# Altium PCB JacdacAccelerometer 30.PcbDoc
Units mm, origin at the board's own origin, x right, y up, seen from the top; angles counter-clockwise.
Board outline 19.05 x 30.7 mm, 2 copper layers (Top Layer, Bottom Layer), stack 1.525 mm thick; 29 components, 18 nets, 109 pads, 22 vias.
Unrouted connection lines stored in the file: 15.
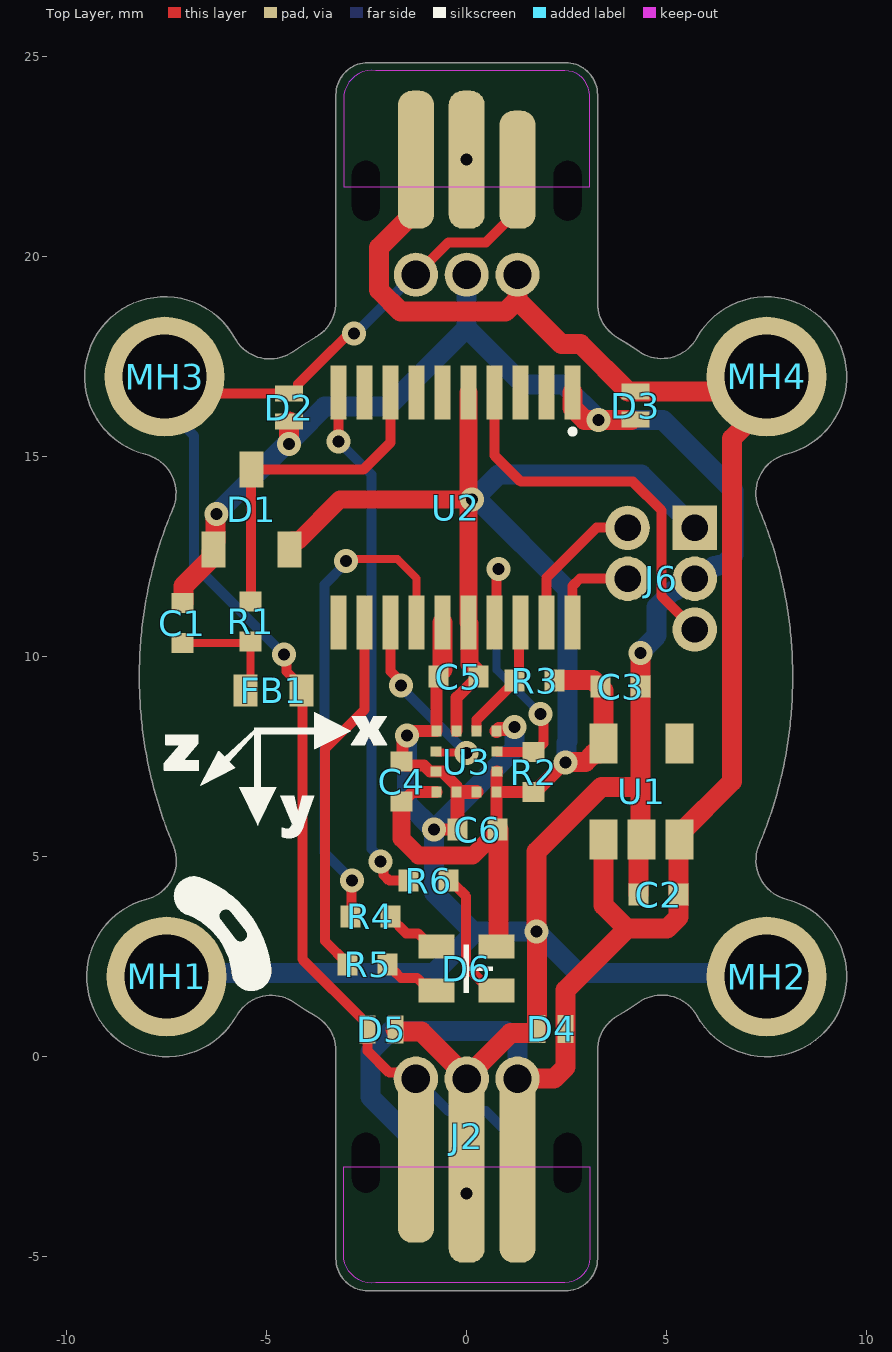
[diagram p0: Top Layer view]
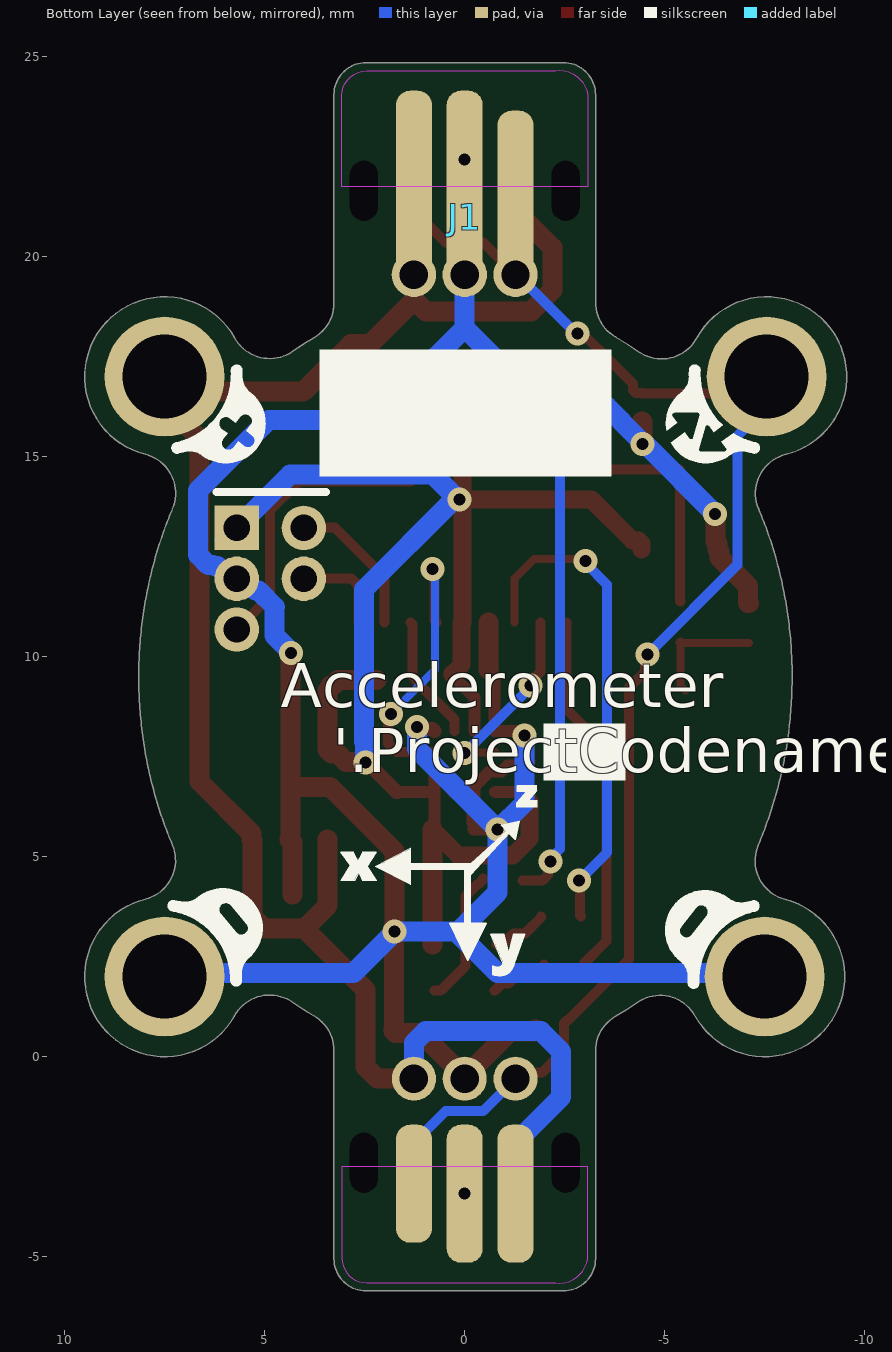
[diagram p1: Bottom Layer view, seen from below]

## Layer stack, top to bottom
Top Solder: solder mask 0.0102, Solder Resist, Dk 3.5
Top Layer: signal copper 0.0356
Dielectric 1: core 1.454, FR-4, Dk 4.2
Bottom Layer: signal copper 0.0356
Bottom Solder: solder mask 0.0102, Solder Resist, Dk 3.5

## Board outline
-8.06,7.849 -8.073,7.935 -8.085,8.021 -8.096,8.107 -8.107,8.193 -8.117,8.28 -8.126,8.366 -8.135,8.453 -8.143,8.539 -8.15,8.626 -8.156,8.712 -8.162,8.799 -8.167,8.886 -8.172,8.973 -8.176,9.06 -8.179,9.147 -8.182,9.234 -8.183,9.321 -8.184,9.408 -8.185,9.495 -8.185,9.582 -8.184,9.669 -8.182,9.756 -8.18,9.843 -8.177,9.93 -8.173,10.017 -8.169,10.104 -8.164,10.191 -8.158,10.278 -8.151,10.364 -8.144,10.451 -8.137,10.538 -8.128,10.624 -8.119,10.71 -8.109,10.797 -8.099,10.883 -8.087,10.969 -8.075,11.055 -8.063,11.141 -8.05,11.226 -8.036,11.312 -8.021,11.397 -8.006,11.483 -7.99,11.568 -7.974,11.653 -7.956,11.737 -7.938,11.822 -7.92,11.906 -7.901,11.99 -7.881,12.074 -7.86,12.158 -7.839,12.241 -7.817,12.324 -7.794,12.407 -7.771,12.49 -7.747,12.573 -7.723,12.655 -7.698,12.737 -7.672,12.819 -7.646,12.9 -7.618,12.981 -7.591,13.062 -7.562,13.143 -7.533,13.223 -7.504,13.303 -7.474,13.382 -7.443,13.462 -7.411,13.541 -7.379,13.619 -7.346,13.698 ccw(c-8.267,14.087) -8.028,15.058 cw(c-7.55,17) -5.797,17.963 ccw(c-4.921,18.444) -4.344,17.627 cw(c-0.015,11.487) -3.77,17.994 ccw(c-4.27,18.86) -3.27,18.86 -3.27,24.05 cw(c-2.471,24.051) -2.47,24.85 2.47,24.85 cw(c2.471,24.051) 3.27,24.05 3.27,18.843 ccw(c4.27,18.843) 3.767,17.979 cw(c-0.014,11.489) 4.302,17.636 ccw(c4.876,18.454) 5.751,17.97 cw(c7.5,17) 7.984,15.06 ccw(c8.227,14.089) 7.306,13.699 7.339,13.621 7.371,13.542 7.403,13.463 7.434,13.384 7.464,13.304 7.494,13.225 7.523,13.144 7.551,13.064 7.579,12.983 7.606,12.902 7.632,12.821 7.658,12.739 7.683,12.657 7.708,12.575 7.732,12.492 7.755,12.41 7.778,12.327 7.8,12.244 7.821,12.16 7.842,12.077 7.862,11.993 7.881,11.909 7.9,11.824 7.918,11.74 7.935,11.655 7.952,11.57 7.968,11.485 7.983,11.4 7.998,11.315 8.012,11.229 8.025,11.144 8.038,11.058 8.05,10.972 8.061,10.886 8.072,10.8 8.082,10.714 8.091,10.628 8.1,10.541 8.107,10.455 8.115,10.368 8.121,10.281 8.127,10.195 8.132,10.108 8.137,10.021 8.14,9.934 8.144,9.847 8.146,9.76 8.148,9.673 8.149,9.586 8.149,9.499 8.149,9.412 8.148,9.325 8.146,9.238 8.144,9.151 8.141,9.064 8.137,8.977 8.133,8.891 8.128,8.804 8.122,8.717 8.115,8.63 8.108,8.544 8.1,8.457 8.092,8.371 8.083,8.284 8.073,8.198 8.062,8.112 8.051,8.026 8.039,7.94 8.027,7.854 8.013,7.769 7.999,7.683 7.985,7.598 7.97,7.513 7.954,7.428 7.937,7.343 7.92,7.258 7.902,7.174 7.883,7.09 7.864,7.006 7.844,6.922 7.823,6.838 7.802,6.755 7.78,6.672 7.758,6.589 7.734,6.506 7.711,6.424 7.686,6.341 7.661,6.259 7.635,6.178 7.609,6.096 7.582,6.015 7.554,5.935 7.526,5.854 7.497,5.774 7.467,5.694 7.437,5.614 7.406,5.535 7.374,5.456 7.342,5.378 7.31,5.3 ccw(c8.23,4.91) 7.987,3.94 cw(c7.5,2) 5.752,1.029 ccw(c4.878,0.543) 4.303,1.362 cw(c-0.009,7.512) 3.767,1.019 ccw(c4.27,0.154) 3.27,0.154 3.27,-5.05 cw(c2.471,-5.051) 2.47,-5.85 -2.47,-5.85 cw(c-2.471,-5.051) -3.27,-5.05 -3.27,0.143 ccw(c-4.27,0.143) -3.77,1.008 cw(c-0.01,7.513) -4.311,1.353 ccw(c-4.883,0.533) -5.755,1.022 cw(c-7.5,2) -8.006,3.935 ccw(c-8.259,4.902) -7.339,5.294 -7.371,5.372 -7.404,5.45 -7.435,5.529 -7.466,5.609 -7.497,5.688 -7.526,5.768 -7.556,5.848 -7.584,5.929 -7.612,6.01 -7.639,6.091 -7.666,6.172 -7.692,6.254 -7.717,6.336 -7.742,6.418 -7.766,6.5 -7.789,6.583 -7.812,6.666 -7.834,6.749 -7.855,6.833 -7.876,6.916 -7.896,7 -7.915,7.084 -7.934,7.169 -7.952,7.253 -7.969,7.338 -7.986,7.423 -8.002,7.508 -8.018,7.593 -8.032,7.678 -8.046,7.764

## Design rules (kind name [scope] priority, off if disabled: settings)
AssemblyTestPointUsage [All] p1: valid=2
BoardOutlineClearance [All] p1: gap=0.3 ignorepadtopadclearanceinfootprint=FALSE except(0: Arc-SplitContinuation Track-SplitContinuation SMDPad-SplitContinuation THPad-SplitContinuation Via-SplitContinuation Fill-SplitContinuation Poly-SplitContinuation Region-OutlineEdge Region-SplitContinuation Text-OutlineEdge Text-SplitContinuation; 0.25: THPad-OutlineEdge Poly-OutlineEdge)
Clearance [All] p1: gap=0.125 ignorepadtopadclearanceinfootprint=FALSE except(0: Arc-Hole Track-Hole SMDPad-Hole THPad-Hole Via-Hole Fill-Hole Poly-Hole Region-Hole Text-Hole; 0.15: Arc-Arc Arc-Track Track-Track)
ComponentClearance SpecialComponentClearance [InComponent('MH1') or InComponent('MH2')  or InComponent('MH3')  or InComponent('MH4') vs InComponent('J3') or InComponent('J4')  or InComponent('J6')  or InComponent('J7') or InComponent('J2') or InComponent('MH2') or InComponent('J1')] p1: gap=0 collisioncheckmode=3 verticalgap=0 showdistances=FALSE
ComponentClearance [All] p2: gap=0.2 collisioncheckmode=3 verticalgap=0.2 showdistances=FALSE
DiffPairsRouting [All] p1: maxlimit=2 minlimit=0.15 mostfreqgap=0.15 toplayer_minwidth=0.15 toplayer_maxwidth=2 toplayer_prefwidth=0.15 bottomlayer_minwidth=0.15 bottomlayer_maxwidth=2 bottomlayer_prefwidth=0.15 substack1={CB9D278B-8BF5-444A-AAF4-837A2A9DF42D} toplayer_{cb9d278b-8bf5-444a-aaf4-837a2a9df42d}_minwidth=0.381 toplayer_{cb9d278b-8bf5-444a-aaf4-837a2a9df42d}_maxwidth=0.381 toplayer_{cb9d278b-8bf5-444a-aaf4-837a2a9df42d}_prefwidth=0.381 bottomlayer_{cb9d278b-8bf5-444a-aaf4-837a2a9df42d}_minwidth=0.381 bottomlayer_{cb9d278b-8bf5-444a-aaf4-837a2a9df42d}_maxwidth=0.381 bottomlayer_{cb9d278b-8bf5-444a-aaf4-837a2a9df42d}_prefwidth=0.381 substack2={826B8647-A721-4255-895A-19F9591B9CD1} toplayer_{826b8647-a721-4255-895a-19f9591b9cd1}_minwidth=0.381 toplayer_{826b8647-a721-4255-895a-19f9591b9cd1}_maxwidth=0.381 toplayer_{826b8647-a721-4255-895a-19f9591b9cd1}_prefwidth=0.381 bottomlayer_{826b8647-a721-4255-895a-19f9591b9cd1}_minwidth=0.381 bottomlayer_{826b8647-a721-4255-895a-19f9591b9cd1}_maxwidth=0.381 bottomlayer_{826b8647-a721-4255-895a-19f9591b9cd1}_prefwidth=0.381 substack3={E64FCAF4-1BC8-437D-B1E0-0E5F2DC0F59E} toplayer_{e64fcaf4-1bc8-437d-b1e0-0e5f2dc0f59e}_minwidth=0.381 toplayer_{e64fcaf4-1bc8-437d-b1e0-0e5f2dc0f59e}_maxwidth=0.381 toplayer_{e64fcaf4-1bc8-437d-b1e0-0e5f2dc0f59e}_prefwidth=0.381 bottomlayer_{e64fcaf4-1bc8-437d-b1e0-0e5f2dc0f59e}_minwidth=0.381 bottomlayer_{e64fcaf4-1bc8-437d-b1e0-0e5f2dc0f59e}_maxwidth=0.381 bottomlayer_{e64fcaf4-1bc8-437d-b1e0-0e5f2dc0f59e}_prefwidth=0.381 substack4={E61CE66C-507C-4E1E-8E83-C905434AFC1C} toplayer_{e61ce66c-507c-4e1e-8e83-c905434afc1c}_minwidth=0.381 toplayer_{e61ce66c-507c-4e1e-8e83-c905434afc1c}_maxwidth=0.381 toplayer_{e61ce66c-507c-4e1e-8e83-c905434afc1c}_prefwidth=0.381 bottomlayer_{e61ce66c-507c-4e1e-8e83-c905434afc1c}_minwidth=0.381 bottomlayer_{e61ce66c-507c-4e1e-8e83-c905434afc1c}_maxwidth=0.381 bottomlayer_{e61ce66c-507c-4e1e-8e83-c905434afc1c}_prefwidth=0.381 maxuncoupledlength=25
FabricationTestPointUsage [All] p1: valid=2 allowmultiple=FALSE
HoleSize [All] p1: absolutevalues=TRUE maxlimit=2.54 minlimit=0.2 maxpercent=80.000 minpercent=20.000
MinimumSolderMaskSliver [All] p1: minsoldermaskwidth=0.005
PlaneClearance [All] p1: clearance=0.3
PlaneConnect [All] p1: planeconnectstyle=Relief reliefexpansion=0.5 reliefentries=4 reliefconductorwidth=0.2 reliefairgap=0.3
PolygonConnect "PolygonConnect GND" [isVIA] p1: connectstyle=Relief reliefconductorwidth=0.2 reliefentries=4 polygonreliefangle="90 Angle" airgapwidth=0.2
PolygonConnect [All] p2: connectstyle=Relief reliefconductorwidth=0.2 reliefentries=4 polygonreliefangle="90 Angle" airgapwidth=0.2
RoutingVias [All] p1: holewidth=0.3 width=0.6 viastyle="Through Hole" minholewidth=0.3 minwidth=0.6 maxholewidth=0.3 maxwidth=0.8
SilkToSilkClearance [All] p1: silktosilkclearance=0.001
SilkToSolderMaskClearance [IsPad] p1: minsilkscreentomaskgap=0.05 clearancetoexposedcopper=TRUE
SolderMaskExpansion [All] p1: expansion=0.075 istentingtop=FALSE
Width [All] p1: maxlimit=2 minlimit=0.15 preferedwidth=0.15 substack1={CB9D278B-8BF5-444A-AAF4-837A2A9DF42D} substack2={826B8647-A721-4255-895A-19F9591B9CD1} substack3={E64FCAF4-1BC8-437D-B1E0-0E5F2DC0F59E} substack4={E61CE66C-507C-4E1E-8E83-C905434AFC1C} minimp=50.000000 maximp=50.000000 favimp=50.000000
20 further rules are at their usual default settings.

## Components (designator, comment, footprint, x,y, rotation, side; value= is the part's Value field where it differs from the comment)
C1 "CL05C330JB51PNC" "C0402_0.55MM - without outline" -7.11,10.839 r270 top
C2 "CL05A105KP5NNNC" "C0402_0.55MM - without outline" 4.8,4.05 r0 top
C3 "CL05A105KP5NNNC" "C0402_0.55MM - without outline" 3.85,9.25 r180 top
C4 "CL05A105KP5NNNC" "C0402_0.55MM - without outline" -1.625,6.875 r270 top
C5 "CL05A105KP5NNNC" "C0402_0.55MM - without outline" -0.2,9.5 r0 top
C6 "CL05A105KP5NNNC" "C0402_0.55MM - without outline" 0.275,5.675 r0 top
D1 "BAT54S" "NXP-BAT54S-TO-236AB - without outline" -5.375,13.675 r90 top
D2 "RCLAMP0521P-N" "TVS 0402 - L" -4.437,16.228 r270 top
D3 "RCLAMP0521P-N" "TVS 0402 - L" 4.225,16.275 r270 top
D4 "RCLAMP0521P-N" "TVS 0402 - L" 2.125,0.692 r180 top
D5 "RCLAMP0521P-N" "TVS 0402 - L" -2.125,0.675 r0 top
D6 "HSMF-C114" HSMF-C114 0,2.2 r180 top
FB1 "TDK MPZ1608S102ATA00" "TDK MPZ1608 0.8mm - without outline" -4.825,9.15 r180 top
J1 "3 pin JACDAC edge connector" JACDAC_EDGE_CONNECTOR_NO_TRACES 0,19 r180 bottom
J2 "3 pin JACDAC edge connector" JACDAC_EDGE_CONNECTOR_NO_TRACES 0,0 r180 top
J6 "Hack Connect Mini 1.27 mm pitch 2-row" HACK_CONNECT_MINI_5_X_1_27 5.7,13.22 r180 top
MH1 "MH_5.0MMK_3.0MMC_2.1MMD_PTH" MH_5.0MMK_3.0MMC_2.1MMD_PTH -7.5,2 r180 top
MH2 "MH_5.0MMK_3.0MMC_2.1MMD_PTH" MH_5.0MMK_3.0MMC_2.1MMD_PTH 7.5,2 r0 top
MH3 "MH_5.0MMK_3.0MMC_2.1MMD_PTH" MH_5.0MMK_3.0MMC_2.1MMD_PTH -7.55,17 r180 top
MH4 "MH_5.0MMK_3.0MMC_2.1MMD_PTH" MH_5.0MMK_3.0MMC_2.1MMD_PTH 7.5,17 r0 top
R1 "RC0402FR-07220RL" "R0402 - Without outline" -5.4,10.875 r270 top
R2 "RC0402FR-072K2L" "R0402 - Without outline" 1.675,7.115 r90 top
R3 "RC0402FR-072K2L" "R0402 - Without outline" 1.7,9.4 r180 top
R4 "RC0402FR-0730RL" "R0402 - Without outline" -2.407,3.504 r180 top
R5 "RC0402FR-0730RL" "R0402 - Without outline" -2.477,2.3 r180 top
R6 "RC0402FR-07150RL" "R0402 - Without outline" -0.95,4.4 r180 top
U1 "LDO 3.3V/300 mA" "ON_SEMI-SOT23-5 - without outline" 4.375,6.625 r90 top
U2 "STM32F030F4P6" "20-TSSOP - without outline" -0.275,13.725 r270 top
U3 "KXTJ3-1057" KXTJ3-1057 0,7.376 r270 top

## Footprints (in the part's own frame and the unit in brackets; to place one, negate y for a bottom-side part, rotate by r counter-clockwise, add the part's x,y. Pads: shape width x height; smd on the part's side, far side on the other; paste and mask are expansions set on the pad)
"20-TSSOP - without outline" [mm]
  rect 1.35x0.4 smd: 1(-2.875,2.925) 2(-2.875,2.275) 3(-2.875,1.625) 4(-2.875,0.975) 5(-2.875,0.325) 6(-2.875,-0.325) 7(-2.875,-0.975) 8(-2.875,-1.625) 9(-2.875,-2.275) 10(-2.875,-2.925) 11(2.875,-2.925) 12(2.875,-2.275) 13(2.875,-1.625) 14(2.875,-0.975) 15(2.875,-0.325) 16(2.875,0.325) 17(2.875,0.975) 18(2.875,1.625) 19(2.875,2.275) 20(2.875,2.925)
  silkscreen extent -1.95,2.87 -1.86,2.97, body extent -3.3,-3.3 3.3,3.3, height 1.2
"C0402_0.55MM - without outline" [mm]
  rect 0.5x0.55 smd: 1(-0.5,0) 2(0.5,0)
  body extent -0.5,-0.25 0.5,0.25, height 0.55
HACK_CONNECT_MINI_5_X_1_27 [mm]
  rect 1.11x1.11 hole 0.66: 1(0,0)
  round 1.11 hole 0.66: 2(1.676,0) 3(0,1.27) 4(1.676,1.27) 5(0,2.54)
HSMF-C114 [mm] "LED RGB DIFFUSED CHIP SMD"
  rect 0.9x0.6 smd mask+0.05: 1(-0.75,-0.55) 2(-0.75,0.55) 3(0.75,0.55) 4(0.75,-0.55)
  silkscreen extent -0.65,-0.6 0.07,0.6, body extent -0.8,-0.75 0.8,0.75, height 0.55
JACDAC_EDGE_CONNECTOR_NO_TRACES [mm] "JacDac 3 pin connector with no traces"
  rrect78% 0.9x2.95 smd far side paste-1 mask+0: 1(-1.27,3.175)
  round 1.11 / inner round 0.71 / far side round 1.1 hole 0.71 paste-0.254 mask+0: 1(1.27,0.55) 2(0,0.55) 3(-1.27,0.55)
  rrect78% 0.9x4.3 smd paste-1 mask+0: 1(1.27,2.5)
  rrect78% 0.9x4.8 smd paste-1 mask+0: 2(0,2.75) 3(-1.27,2.75)
  rrect78% 0.9x3.45 smd far side paste-1 mask+0: 2(0,3.425) 3(1.27,3.425)
  round 0 hole 0.7 slot 1.5 at 90 deg unplated: ""(-2.52,2.65) ""(2.52,2.65)
  Top Layer keep-out region: -3.075,2.75 -3.07,5.033 -2.987,5.341 -2.761,5.567 -2.453,5.65 -2.453,5.65 2.27,5.65 2.545,5.635 2.794,5.516 2.978,5.31 3.07,5.05 3.07,5.05 3.07,2.75
  Bottom Layer lines w0.2: -1.126,0.85 -1.27,0.85
  Bottom Layer keep-out region: -3.07,2.75 -3.07,5.033 -3.023,5.269 -2.889,5.469 -2.689,5.603 -2.453,5.65 -2.453,5.65 2.27,5.65 2.545,5.635 2.794,5.516 2.978,5.31 3.07,5.05 3.07,5.05 3.07,2.75
KXTJ3-1057 [mm]
  rect 0.275x0.25 smd: 1(-0.763,0.75) 2(-0.763,0.25) 3(-0.763,-0.25) 4(-0.763,-0.75) 7(0.763,-0.75) 8(0.763,-0.25) 9(0.763,0.25) 10(0.763,0.75)
  rect 0.25x0.275 smd: 5(-0.25,-0.763) 6(0.25,-0.763) 11(0.25,0.763) 12(-0.25,0.763)
  body extent -1,-1 1,1, height 0.93
MH_5.0MMK_3.0MMC_2.1MMD_PTH [mm] "Mounting Hole 5.0mm clearance, 3.1 annualar ring and 2.1mm PTH"
  round 3 hole 2.1 mask+0.05: 1(0,0)
"NXP-BAT54S-TO-236AB - without outline" [mm] "SOT23, 3-Leads, Body 2.90x2.30mm, Pitch 0.95mm, IPC Medium Density"
  rect 0.9x0.6 smd: 1(-1,0.95) 2(-1,-0.95) 3(1,0)
  body extent -1.32,-1.5 1.32,1.5, height 1.12
"ON_SEMI-SOT23-5 - without outline" [mm]
  rect 1x0.7 smd: 1(-1.2,0.95) 2(-1.2,0) 3(-1.2,-0.95) 4(1.2,-0.95) 5(1.2,0.95)
  body extent -1.5,-1.57 1.5,1.58, height 1.1
"R0402 - Without outline" [mm]
  rect 0.5x0.55 smd: 1(-0.5,0) 2(0.5,0)
  body extent -0.5,-0.25 0.5,0.25, height 0.35
"TDK MPZ1608 0.8mm - without outline" [mm]
  rect 0.6x0.8 smd paste-0.1: 1(-0.7,0) 2(0.7,0)
  body extent -0.8,-0.4 0.8,0.4, height 0.8
"TVS 0402 - L" [mm] "TVS 0402 RoHS"
  rect 0.4x0.7 smd paste-0.038 mask+0.05: 1(-0.35,0) 2(0.35,0)
  body extent -0.5,-0.3 0.5,0.3, height 0.5

## Part data
C1: "CAP CER 33PF 50V NP0 0402", Capacitance=33pF, Case Code (Imperial)=0402, Case Code (Metric)=1005, Manufacturer=Samsung, Max Operating Temperature=125°C, Min Operating Temperature=-55°C, Ratings=AEC-Q200, Supplier Part Number 1=1276-6515-1-ND, Tolerance=5%, Voltage Rating=50V, Case/Package=0402, Category=Capacitors, Checked=?, ComponentLink1Description="Samsung datasheet online", ComponentLink1URL=http://www.samsungsem.com/kr/support/library/product-catalog/mlcc.jsp, Created=DG, Lead Free="Lead Free", Length=0.039inch, Manufacturer Part Number=CL05C330JB51PNC, Mount="Surface Mount", Packaging="Tape and Reel", Pricing 1="1=0.10000, 10=0.07500, 50=0.04060, 100=0.03320, 500=0.02374, 1000=0.01865, 2500=0.01696, 5000=0.01560 (USD)", Pricing 2="1=0.11000, 10=0.08200, 100=0.03600, 500=0.02600, 1000=0.02000, 2500=0.01800 (USD)", Pricing 3="10000=0.00780 (USD)", RoHS=Yes, Stock 1=250654, Stock 2=97900, Stock 3=100000, Supplier 1=Digi-Key, Supplier 2=Mouser, Supplier 3="Future Electronics", Supplier Part Number 2=187-CL05C330JB51PNC, Supplier Part Number 3=6022520, Thickness=0.022inch, Width=0.02inch
C2 C3 C4 C5 C6: "CAP CER 1UF 10V X5R 0402", Capacitance=1µF, Case Code (Imperial)=0402, Case Code (Metric)=1005, Dielectric=X5R, Manufacturer=Samsung, Max Operating Temperature=85°C, Min Operating Temperature=-55°C, Package Quantity=1, Supplier Part Number 1=1276-1076-1-ND, Tolerance=10%, Voltage Rating=10V, Case/Package=0402, Category=Capacitors, Checked=?, ComponentLink1Description="Online datasheet", ComponentLink1URL=https://datasheet.ciiva.com/15195/getdatasheetpartid-358390-15195630.pdf, Contact Plating=Tin, Created=DG, Depth=0.5mm, Height=0.5mm, Length=1mm, Manufacturer Part Number=CL05A105KP5NNNC, Material=Ceramic, Mount="Surface Mount", Packaging="Tape and Reel", Pricing 1="1=0.10000, 10=0.03900, 50=0.02100, 100=0.01720, 500=0.01228, 1000=0.00965, 2500=0.00877, 5000=0.00807 (USD)", Pricing 2="1=0.10000, 10=0.04200, 100=0.01800, 500=0.01300, 1000=0.01000, 2500=0.00900 (USD)", Pricing 3="10=0.02450, 100=0.02000, 500=0.01310, 2500=0.00920, 5000=0.00810, 10000=0.00640, 50000=0.00490 (GBP)", Radiation Hardening=No, RoHS=Yes, Stock 1=5705569, Stock 2=928941, Stock 3=53670, Supplier 1=Digi-Key, Supplier 2=Mouser, Supplier 3=Farnell, Supplier Part Number 2=187-CL05A105KP5NNNC, Supplier Part Number 3=3013329, Thickness=0.022inch, Width=0.02inch
D1: "DIODE ARRAY SCHOTTKY 30V SOT23", Manufacturer=Nexperia, Manufacturer Part Number=BAT54S,235, Supplier Part Number 1=1727-1868-1-ND, Category="Rectifier Diodes", ComponentLink1Description="NXP datasheet online", ComponentLink1URL=https://assets.nexperia.com/documents/data-sheet/BAT54_SER.pdf, Pricing 1="1=0.13000, 10=0.11900, 100=0.05610, 500=0.03326, 1000=0.02185, 5000=0.02138 (USD)", RoHS=No, Stock 1=14011, Supplier 1=Digi-Key, Supplier 2=Mouser, Supplier 3=RSComponents, Supplier Part Number 2=771-BAT54S235, Supplier Part Number 3=1707990
D2 D3 D4 D5: "Bidirectional 5V (Max) 6V 16V 3.5A (8/20us) 0402 TVS RoHS", Manufacturer="Born Semiconductor", Package=0402, Supplier1 Part Number=C316043, Checked By=?, ComponentLink1Description="Online datasheet", ComponentLink1URL=https://datasheet.lcsc.com/szlcsc/Bourne-Semicon-Shenzhen-RCLAMP0521P-N_C316043.pdf, Created By="D Gakure", Manufacturer Part Number=RCLAMP0521P-N, Supplier1=LCSC
D6: "Red, Green, Blue (RGB) 626nm Red, 525nm Green, 470nm Blue LED Indication - Discrete 1.9V Red, 3.4V Green, 3.4V Blue 0606 (1616 Metric)", Case Code (Imperial)=0606, Case Code (Metric)=1616, Color=Blue,Green,Red, Forward Current=20mA, Forward Voltage=3.4V, Lens Color=White, Manufacturer="Broadcom Avago", Max Operating Temperature=85°C, Min Operating Temperature=-40°C, Package Quantity=4000, Power Rating=78mW, Reverse Voltage=5V, Supplier Part Number 1=516-1795-1-ND, Case/Package=0606, Category=Optoelectronics, Checked By=?, ComponentLink1Description="Online datasheet", ComponentLink1URL=https://docs.broadcom.com/docs/AV02-2451EN, Created By="D. Gakure", Depth=1.6mm, Dominant Wavelength=470nm, Height=0.35mm, Lead Free="Lead Free", Length=1.6mm, Lens Style=Diffused,Rectangular, Lens Transparency=Diffused, Luminous Intensity=70mcd, Manufacturer Part Number=HSMF-C114, Mount="Surface Mount", Number of Elements=3, Number of LEDs=3, Number of Pins=4, Packaging="Tape and Reel", Pricing 1="1=1.78000, 10=1.12500, 100=0.83250, 500=0.76500, 1000=0.63000, 2000=0.59850 (USD)", Pricing 2="1=1.56000, 10=0.97100, 25=0.87800, 50=0.78500, 100=0.69200, 500=0.60500 (GBP)", Pricing 3="1=1.69000, 10=1.13000, 50=1.13000, 100=0.85600, 1000=0.74800, 10000=0.74800 (USD)", Radiation Hardening=No, REACH SVHC="No SVHC", RoHS=Yes, Stock 1=20555, Stock 2=8134, Stock 3=14991, Supplier 1=Digi-Key, Supplier 2=Farnell, Supplier 3=Mouser, Supplier Part Number 2=1058362, Supplier Part Number 3=630-HSMF-C114, Test Current=20mA, Viewing Angle=145°, Wavelength=470nm, Width=1.5mm
FB1: "0603 1k@100MHz 0.8A chip", Case Code (Imperial)=0603, Case Code (Metric)=1608, Current Rating=800mA, DC Resistance (DCR)=300mR, Manufacturer=TDK, Manufacturer Part Number=MPZ1608S102ATA00, Package Quantity=4000, Supplier Part Number 1=445-8694-1-ND, Tolerance=25%, Case/Package=0603, ComponentLink2Description="datasheet online", ComponentLink2URL=https://www.mouser.co.uk/datasheet/2/400/eads_commercial_power_mpz1608_en-923650.pdf, ComponentLink3Description=datasheet, ComponentLink3URL="Y:\System\Altium\Libraries 2014\TDK\Datasheets\eads_commercial_power_mpz1608_en-923650.pdf", Core Material=Ferrite, Height=0.037inch, Impedance="1kR @ 100MHz", Length=0.063inch, Max DC Current=800mA, Mount="Surface Mount", Packaging="Tape and Reel", Pricing 1="1=0.1, 10=0.079, 25=0.0716, 50=0.0644, 100=0.0472, 250=0.03432, 500=0.03146, 1000=0.02717 (USD)", Stock 1=113542, Supplier 1=Digi-Key, Supplier 2=Mouser, Supplier Part Number 2=810-MPZ1608S102ATA00, Width=0.031inch
J1 J2: library part "Jacdac edge connector", "3 pin Jacdac edge connector 1.27mm pitch", Manufacturer Part Number=JACDAC_EDGE_CONNECTOR, Checked By=?, ComponentLink1Description="Yuliang JACDAC cable connector drawing online", ComponentLink1URL=https://github.com/microsoft/jacdac-mdk/blob/main/connector/JACDAC-Connector-by-Yuliang-2020-11-28.pdf, ComponentLink2Description="JACDAC PCB edge connector spec onlin", ComponentLink2URL=https://github.com/microsoft/jacdac-mdk/blob/main/connector/JACDAC_PCB_Edge_Connector_Drawing_JD-PEC-01_rev_01.pdf, Created By="D. Gakure", PCB Type="1.6mm FR4"
J6: library part HACK_CONNECT_MINI
MH1 MH2 MH3 MH4: "Mounting Hole 5.0mm keepout, 3.0mm annualar ring and 2.1mm Drill PTH"
R1: "RES SMD 220 OHM 1% 1/16W 0402", Case Code (Imperial)=0402, Case Code (Metric)=1005, Manufacturer=Yageo, Max Operating Temperature=155°C, Max Power Dissipation=63mW, Min Operating Temperature=-55°C, Package Quantity=1, Power Rating=62.5mW, Resistance=220R, Resistor Type="Thick Film", Supplier Part Number 1=311-220LRCT-ND, Temperature Coefficient=100ppm/°C, Tolerance=1%, Voltage Rating=50V, Case/Package=0402, Category=Resistors, Checked=?, ComponentLink1Description="Online datasheet", ComponentLink1URL=https://datasheet.ciiva.com/11819/0900766b80c66297-11819466.pdf, Created=D.G, Depth=0.5mm, Features="Moisture Resistant", Height=0.016inch, Lead Free="Lead Free", Length=1mm, Manufacturer Part Number=RC0402FR-07220RL, Military Standard=Not, Number of Pins=2, Number of Terminations=2, Packaging="Tape and Reel", Pricing 1="1=0.10000, 10=0.01400, 100=0.00580, 1000=0.00262, 2500=0.00228, 5000=0.00188 (USD)", Pricing 2="1=0.10000, 10=0.01200, 100=0.00400, 1000=0.00400, 2500=0.00400, 10000=0.00300 (USD)", Pricing 3="1=0.08130, 25=0.01210, 100=0.01120, 250=0.01030, 500=0.00900 (GBP)", REACH SVHC="No SVHC", RoHS=Yes, Stock 1=1286042, Stock 2=324625, Stock 3=18234, Supplier 1=Digi-Key, Supplier 2=Mouser, Supplier 3=Farnell, Supplier Part Number 2=603-RC0402FR-07220RL, Supplier Part Number 3=2147864, Termination=SMD/SMT, Voltage Rating (DC)=50V, Width=0.02inch
R2 R3: "RES SMD 2.2K OHM 1% 1/16W 0402", Case Code (Imperial)=0402, Case Code (Metric)=1005, Manufacturer=Yageo, Max Operating Temperature=155°C, Min Operating Temperature=-55°C, Power Rating=63mW, Resistance=2.2kR, Resistor Type="Thick Film", Supplier Part Number 1=311-2.20KLRCT-ND, Temperature Coefficient=100ppm/°C, Tolerance=1%, Voltage Rating=50V, by=?, Case/Package=0402, Category=Resistors, ComponentLink1Description="Online datasheet", ComponentLink1URL=https://datasheet.ciiva.com/11808/0900766b80c66297-11808786.pdf, Created By="D. Gakure", Depth=0.5mm, Height=0.35mm, Lead Free="Lead Free", Length=1mm, Manufacturer Part Number=RC0402FR-072K2L, Military Standard=Not, Packaging="Tape and Reel", Pricing 1="1=0.10000, 10=0.01400, 100=0.00580, 1000=0.00262, 2500=0.00228, 5000=0.00188 (USD)", Pricing 2="1=0.10000, 10=0.01200, 100=0.00400, 1000=0.00400, 2500=0.00400, 10000=0.00300 (USD)", Pricing 3="10=0.01350, 100=0.01190, 500=0.01020, 2500=0.00460, 5000=0.00420, 10000=0.00370, 50000=0.00240 (GBP)", REACH SVHC=Unknown, RoHS=Yes, Stock 1=6492087, Stock 2=1171407, Stock 3=428944, Supplier 1=Digi-Key, Supplier 2=Mouser, Supplier 3=Farnell, Supplier Part Number 2=603-RC0402FR-072K2L, Supplier Part Number 3=9239278, Termination=SMD/SMT, Weight=2.3E-05oz, Width=0.5mm
R4 R5: "RES SMD 30 OHM 1% 1/16W 0402", Case Code (Imperial)=0402, Case Code (Metric)=1005, Manufacturer=Yageo, Max Operating Temperature=155°C, Max Power Dissipation=63mW, Min Operating Temperature=-55°C, Resistance=30R, Resistance Tolerance=1%, Resistor Type="Thick Film", Supplier Part Number 1=311-30LRCT-ND, Temperature Coefficient=100ppm/°C, Voltage Rating=50V, Case/Package=0402, Category="Chip SMD Resistors", Checked By=?, ComponentLink1Description="Online datasheet", ComponentLink1URL=https://datasheet.ciiva.com/7849/1018594-7849958.pdf, Construction=Rectangular, Contact Plating=Tin,Matte, Created By="D. Gakure", Depth=0.5mm, Features="Moisture Resistant", Height=0.35mm, Lead Free="Lead Free", Length=1mm, Manufacturer Part Number=RC0402FR-0730RL, Military Standard=Not, Number of Terminations=2, Packaging="Tape and Reel", Power Rating=63mW, Pricing 1="1=0.10000, 10=0.01400, 100=0.00580, 1000=0.00260, 2500=0.00226, 5000=0.00186 (USD)", Pricing 2="1=0.10000, 10=0.01200, 50=0.01200, 100=0.00400, 1000=0.00400, 10000=0.00300 (USD)", Pricing 3="10=0.01210, 100=0.00420, 500=0.00370, 2500=0.00280, 5000=0.00250, 10000=0.00230, 50000=0.00150 (GBP)", REACH SVHC=Unknown, RoHS=Yes, RoHS Compliant=Yes, Series=RC, Size Code=0402, Stock 1=2973, Stock 2=41804, Stock 3=4422, Supplier 1=Digi-Key, Supplier 2=Mouser, Supplier 3=Farnell, Supplier Part Number 2=603-RC0402FR-0730RL, Supplier Part Number 3=1458775, Termination=SMD/SMT, Tolerance=1%, Voltage Rating (DC)=50V, Width=0.5mm
R6: "RES SMD 150 OHM 1% 1/16W 0402", Case Code (Imperial)=0402, Case Code (Metric)=1005, Manufacturer=Yageo, Max Operating Temperature=155°C, Max Power Dissipation=63mW, Min Operating Temperature=-55°C, Package Quantity=1, Power Rating=62.5mW, Resistance=150R, Resistance Tolerance=1%, Resistor Type="Thick Film", Supplier Part Number 1=311-150LRCT-ND, Temperature Coefficient=100ppm/°C, Voltage Rating=50V, Case/Package=0402, Category="Chip SMD Resistors", Checked By=?, ComponentLink1Description="Online datasheet", ComponentLink1URL=https://datasheet.ciiva.com/11808/0900766b80c66297-11808422.pdf, Construction=Rectangular, Created By="D. Gakure", Depth=0.5mm, Features="Moisture Resistant", Height=0.016inch, Lead Free="Lead Free", Length=1mm, Manufacturer Part Number=RC0402FR-07150RL, Military Standard=Not, Number of Terminations=2, Packaging="Tape and Reel", Pricing 1="1=0.10000, 10=0.01400, 100=0.00580, 1000=0.00260, 2500=0.00226, 5000=0.00186 (USD)", Pricing 2="1=0.10000, 10=0.01200, 50=0.01200, 100=0.00400, 1000=0.00400, 10000=0.00300 (USD)", Pricing 3="10000=0.00270, 50000=0.00200 (GBP)", REACH SVHC="No SVHC", RoHS=Yes, RoHS Compliant=Yes, Series=RC, Stock 1=5214533, Stock 2=582717, Stock 3=880000, Supplier 1=Digi-Key, Supplier 2=Mouser, Supplier 3=Farnell, Supplier Part Number 2=603-RC0402FR-07150RL, Supplier Part Number 3=2421893, Technology="THICK FILM", Termination=SMD/SMT, Tolerance=1%, Width=0.02inch, Working Voltage=50V
U1: library part NCP114ASN330T1G, "ON SEMICONDUCTOR - NCP114ASN330T1G - LDO Voltage Regulator, Fixed, 1.7 V to 5.5 V in, 3.3 V/300 mA out, 150 mV drop, TSOP-5", Case/Package=SOT-23-5, Dropout Voltage=225mV, Manufacturer="ON Semiconductor", Max Input Voltage=5.5V, Max Operating Temperature=85°C, Min Operating Temperature=-40°C, Min Output Voltage=3.3V, Output Current=300mA, Power Supply Rejection Ratio (PSRR)=75dB, Quiescent Current=95uA, Supplier Part Number 1=NCP114ASN330T1GOSCT-ND, Category="Voltage Regulators - Linear", Checked=?, ComponentLink3Description="On Semi datasheet online", ComponentLink3URL=http://www.onsemi.com/pub/Collateral/NCP114-D.PDF, Created=DG, Lead Free="Lead Free", Manufacturer Part Number=NCP114ASN330T1G, Mount="Surface Mount", Number of Regulators=1, Output Configuration=Positive, Output Type=Fixed, Packaging="Cut Tape", Pricing 1="1=0.33000, 10=0.24900, 25=0.21760, 100=0.12440, 250=0.11664, 500=0.09330, 1000=0.07153 (USD)", RoHS=No, Stock 1=32529, Supplier 1=Digi-Key, Supplier 2=RSComponents, Supplier 3=Mouser, Supplier Part Number 2=1263178, Supplier Part Number 3=863-NCP114ASN330T1G
U2: library part "ST STM32F030F4P6", "ARM Cortex-M0 STM32F0 Microcontroller IC 32-Bit 48MHz 16KB (16K x 8) FLASH", Case/Package=TSSOP, Frequency=48MHz, Manufacturer=STMicroelectronics, Max Operating Temperature=85°C, Max Power Dissipation=182mW, Max Supply Voltage=3.6V, Min Operating Temperature=-40°C, Min Supply Voltage=2.4V, Package Quantity=74, Supplier Part Number 1=2393635, Categories="Integrated Circuits", Category=Microcontrollers, Checked=?, Checked By=?, ComponentLink1Description="Online datasheet", ComponentLink1URL=https://datasheet.ciiva.com/29720/dm00088500-29720640.pdf, Contact Plating=Gold, Core Architecture=ARM, Created=DG, Created By="D. Gakure", Data Bus Width=32b, Height=1.05mm, Interface=I2C,SPI,UART,USART, Lead Free="Lead Free", Length=6.6mm, Manufacturer Part Number=STM32F030F4P6, Max Frequency=48MHz, Memory Size=16KB, Memory Type=FLASH, Number of ADC Channels=16, Number of I2C Channels=1, Number of I/Os=15, Number of Pins=20, Number of Programmable I/O=15, Number of PWM Channels=6, Number of SPI Channels=1, Number of Timers/Counters=5, Oscillator Type=Internal, Packaging=Rail/Tube, Peripherals=POR,PWM,WDT,DMA, Pricing 1="1=0.97500, 25=0.85400, 50=0.75500, 100=0.65600, 250=0.61800, 500=0.58000, 1000=0.52500, 2500=0.46900 (GBP)", Pricing 3="100=0.43900, 250=0.38800, 1000=0.37300 (GBP)", Radiation Hardening=No, RAM Size=4KB, REACH SVHC="No SVHC", RoHS=Yes, Stock 1=1196, Stock 3=48, Supplier 1=Farnell, Supplier 2=Digi-Key, Supplier 3=RSComponents, Supplier Part Number 2=497-14044-5-ND, Supplier Part Number 3=7925925P, Watchdog Timer=Yes, Width=4.5mm
U3: "KIONIX - KXTJ3-1057 - MEMS ACCELEROMETER, 2G/4G/8G, LGA-12", Case/Package=LGA, Manufacturer="Rohm Kionix", Max Operating Temperature=85°C, Min Operating Temperature=-40°C, Supplier Part Number 1=KXTJ3-1057CT-ND, Axis="X, Y, Z", Bandwidth=800Hz, Checked By=?, ComponentLink2Description="Online datasheet", ComponentLink2URL=http://kionixfs.kionix.com/en/datasheet/KXTJ3-1057-Specifications-Rev-4.0.pdf, Created By="D Gakure", Manufacturer Part Number=KXTJ3-1057, Mount="Surface Mount", Number of Pins=12, Output Type=I2C, Packaging="Tape and Reel", Pricing 1="1=1.54000, 5=1.48000, 10=1.20300, 25=1.03600, 50=0.89720, 100=0.81400, 500=0.68450, 1000=0.61050, 5000=0.55500 (USD)", Pricing 2="1=1.63000, 10=0.98700, 100=0.85900, 500=0.75300, 1000=0.65500, 2500=0.58200 (USD)", RoHS=No, Stock 1=18368, Stock 2=6057, Supplier 1=Digi-Key, Supplier 2=Mouser, Supplier Part Number 2=912-KXTJ3-1057

## Via types
v1: diameter 0.6, hole 0.3, Top Layer to Bottom Layer, tented both sides, 22 vias

## Nets (pads, with @x,y where several pads share a name; then routed paths per layer and width w, separated by ;. In a path a pad name is that pad's centre, name@x,y a point inside that pad or via, vN(x,y) a via of type N, cw(c..) or ccw(c..) an arc to the next point about the centre after c; other vN are vias at no path point)
3V3: C3.2 C4.2 C5.2 C6.2 D1.2 D6.1 J6.1 R2.1 R3.1 U1.5 U2.5 U2.16 U3.3 U3.7 U3.10 U3.11 | length 43.5
  Top Layer w0.3: C4.2 -1.6,6.375 -1.361,6.614 U3.7@-0.761,6.614 ; U3.3 -0.25,8.975 0.3,9.525 C5.2@0.3,9.55 ; D6.1 D6.1@0.8,2.8 ; U3.11 0.75,7.114 U3.10 ; C6.2@0.8,5.675 0.787,5.687 0.75,5.725 U3.10 ; R2.1 1.65,6.615 1.648,6.614 U3.10 ; R3.1@2.2,9.375 R3.1
  Top Layer w0.35: R2.1 1.7,6.615 2.435,7.35 v1(2.475,7.35)
  Top Layer w0.45: D1.2 -4.425,12.825 -4.35,12.9 -4.2,12.9 -3.174,13.926 v1@0.05,13.926 ; C4.2 -1.625,5.45 -1.2,5.025 0.15,5.025 C6.2@0.8,5.675 ; U2.5 v1@0.05,13.926 ; C5.2@0.3,9.55 0.3,9.575 0.075,9.8 0.075,10.825 U2.16 v1@0.05,13.926
  Top Layer w0.5: D6.1@0.8,2.8 C6.2@0.8,5.675 ; R3.1@2.2,9.412 3.163,9.412 3.3,9.275 3.35,9.275 C3.2 C3.2@3.35,9.225 ; v1(2.475,7.35) 2.494,7.369 2.969,7.369 3.175,7.575 3.325,7.575 3.425,7.675 U1.5 C3.2@3.425,9.15
  Bottom Layer w0.5: v1(0.137,13.925) 0.164,13.925 0.789,14.55 4.37,14.55 J6.1 J6.1@5.925,12.995 ; v1@0.274,13.925 2.517,11.682 2.517,7.879 2.494,7.856 2.494,7.369 v1(2.475,7.35) ; J6.1@5.925,13.225 J6.1@5.925,12.995 ; J6.1@6.005,12.915 J6.1@5.925,12.995
ACC_INT: U2.13 U3.5 | length 4.8
  Top Layer w0.2: U3.5 -0.745,7.608 -0.018,7.608 v1(0,7.59)
  Top Layer w0.25: U2.13 -1.9,9.634 -1.647,9.38 v1(-1.647,9.285)
  Bottom Layer w0.25: v1(-1.647,9.285) -1.647,9.237 v1(0,7.59)
ACC_SCL: R2.2 U2.17 U3.12 | length 7.5
  Top Layer w0.25: U2.17 0.75,10.9 0.75,12.149 v1(0.8,12.199) ; U3.12 0.768,7.621 R2.2@1.675,7.621 ; R2.2 1.7,7.615 1.92,7.836 1.92,8.401 1.842,8.479 v1(1.842,8.574)
  Bottom Layer w0.2: v1(0.8,12.199) 0.748,12.148 0.748,9.668 v1(1.842,8.574)
ACC_SDA: R3.2 U2.18 U3.2 | length 3.2
  Top Layer w0.25: U3.2 0.25,8.425 1.2,9.375 R3.2 1.303,9.503 1.303,10.803 U2.18
GND: C1.1 C2.1 C3.1 C4.1 C5.1 C6.1 D1.1 D2.2 D3.2 D4.2 D5.2 J1.2 J2.2 J6.3 MH1.1 MH2.1 U1.2 U2.1 U2.15 U3.1 U3.4 U3.6 U3.8 U3.9 | length 81.2
  Top Layer w0.3: v1(-0.824,5.675) C6.1 ; C5.1@-0.6,9.675 -0.75,9.525 U3.4 -1.386,8.139 v1(-1.495,8.03) -1.604,7.921 -1.604,7.396 C4.1 -1.525,7.275 -1.063,7.275 -0.914,7.126 U3.6 -0.611,7.126 -0.25,6.765 U3.8
  Top Layer w0.35: C6.1@-0.225,5.85 -0.225,6.614 U3.9 ; U3.1 0.803,8.192 1.151,8.192 v1(1.199,8.24)
  Top Layer w0.5: C1.1 -7.085,11.339 -7.085,11.765 -6.375,12.475 -6.375,12.625 D1.1 -6.325,12.825 -6.275,12.875 -6.275,13.525 -6.253,13.547 v1(-6.253,13.574) ; v1(-4.449,15.316) -4.443,15.321 -4.443,15.872 D2.2 ; D5.2 -1.732,0.632 -1.137,0.632 J2.2@0,-0.505 ; C5.1@-0.6,9.675 U2.15 ; J2.2@0,-0.55 J2.2@0,-0.505 ; J1.2@0,19.505 0,19.55 0.195,19.355 J1.2@0.15,19.355 ; U2.1 2.65,16.217 2.943,15.924 v1(3.3,15.924) D3.2@4.125,15.924 ; C2.1 4.3,5.35 U1.2 ; v1(4.339,10.087) 4.35,10.077 C3.1 4.35,6.749 ; U1.2@4.35,5.425 4.35,6.749 ; MH2.1@7.061,2.439 MH2.1 ; J2.2@0,-0.505 1.097,0.592 1.725,0.592 1.775,0.642 D4.2 1.762,0.704 1.762,3.113 v1(1.75,3.125) 1.75,5.13 3.369,6.749 4.35,6.749
  Bottom Layer w0.5: MH1.1 -7.411,2.089 -0.824,2.089 0.212,3.125 ; v1(-6.253,13.574) -4.531,15.297 -4.468,15.297 v1(-4.449,15.316) -4.449,15.343 -3.904,15.887 -3.904,15.902 -3.551,16.256 -1.962,16.256 0,18.218 ; v1(-1.495,8.03) -1.495,6.346 v1(-0.824,5.675) ; J1.2@0,19.55 0,18.218 ; v1(1.199,8.24) 1.199,7.698 v1(-0.824,5.675) ; v1(4.339,10.087) 4.339,10.114 4.75,10.525 4.75,11.241 4.746,11.245 5.153,11.652 5.237,11.652 5.535,11.95 5.865,11.95 6.18,12.265 6.273,12.265 6.298,12.29 6.41,12.29 6.663,12.543 6.663,14.162 4.901,15.924 v1(3.3,15.924) 2.419,16.805 1.413,16.805 0,18.218 ; MH2.1 7.411,2.089 2.786,2.089 v1(1.75,3.125) 0.212,3.125 ; v1(-0.824,5.675) -0.824,4.112 0.163,3.125 0.212,3.125
  other v1: 0,-3.425 0,22.425
JD_DATA: D2.1 D5.1 FB1.1 J1.1 J2.1 MH3.1 | length 36.7
  Top Layer w0.25: MH3.1 -7.128,16.578 D2.1 ; v1(-4.575,10.059) -4.508,9.992 -4.508,9.633 -4.125,9.25 FB1.1 ; D2.1@-4.437,16.59 -4.275,16.59 -4.212,16.653 -4.212,16.815 -3.65,17.378 ; FB1.1@-4.11,9.135 -4.11,2.439 -2.571,0.9 -2.55,0.9 -2.477,0.827 -2.477,0.143 -1.935,-0.399 -1.421,-0.399 J2.1@-1.27,-0.55 ; -3.65,17.379 -3.009,18.02 -2.887,18.02 v1(-2.82,18.087) ; J1.1@-1.27,19.55 -0.459,20.361 0.481,20.361 1.27,21.15 J1.1@1.27,22.175
  Bottom Layer w0.25: MH3.1 -7.55,16.256 -6.815,15.52 -6.815,12.299 v1(-4.575,10.059) ; v1(-2.82,18.087) -2.775,18.087 -1.312,19.55 J1.1@-1.27,19.55 ; J2.1@-1.27,-0.55 -0.459,-1.361 0.481,-1.361 1.27,-2.15 J2.1@1.27,-3.175
JD_DATA_MCU: D1.3 R1.1 U2.8 | length 8.3
  Top Layer w0.25: R1.1 -5.388,11.387 -5.388,14.663 D1.3 -2.585,14.675 -1.9,15.36 U2.8
JD_PWR: C2.2 D3.1 D4.1 J1.3 J2.3 MH4.1 U1.1 U1.3 | length 48.1
  Top Layer w0.5: J1.3@-1.27,22.425 -1.27,21.15 -2.195,20.225 -2.195,19.167 -1.653,18.625 0.971,18.625 1.264,18.918 ; J2.3@1.27,-0.55 2.182,-0.55 2.475,-0.257 2.475,1.669 4.006,3.2 ; J1.3@1.27,19.55 1.264,19.544 1.264,18.918 ; U1.1 3.425,3.781 4.006,3.2 ; D3.1@4.175,16.625 D3.1 ; 1.264,18.918 2.364,17.817 2.845,17.817 4.038,16.625 D3.1 ; 4.006,3.2 5.007,3.2 5.3,3.493 5.3,5.4 U1.3 5.325,5.575 6.63,6.88 6.63,15.454 7.5,16.324 MH4.1 7.125,16.625 D3.1
  Bottom Layer w0.5: J2.3@-1.27,-3.425 -1.27,-2.15 -2.408,-1.012 -2.408,0.135 -1.901,0.642 0.977,0.642 1.27,0.35 J2.3@1.27,-0.55
JD_RGB_B: R4.2 U2.14 | length 12.5
  Top Layer w0.2: v1(-3.017,12.391) -2.971,12.438 -1.733,12.438 -1.25,11.955 U2.14 ; R4.2@-2.907,3.479 R4.2
  Top Layer w0.25: R4.2 -2.885,3.527 -2.885,4.383 v1(-2.862,4.405)
  Bottom Layer w0.25: v1(-3.017,12.391) -3.017,12.344 -3.559,11.802 -3.559,5.102 v1(-2.862,4.405)
JD_RGB_G: R5.2 U2.12 | length 9.2
  Top Layer w0.25: R5.2 -2.977,2.325 -3.543,2.892 -3.543,7.69 -2.55,8.684 U2.12
JD_RGB_R: R6.2 U2.10 | length 13.2
  Top Layer w0.25: v1(-3.207,15.381) -3.203,15.384 -3.203,16.597 U2.10 ; v1(-2.15,4.875) -2.083,4.808 -2.083,4.546 -1.937,4.4 R6.2
  Bottom Layer w0.25: v1(-3.207,15.381) -2.384,14.558 -2.384,5.196 -2.15,4.962 v1(-2.15,4.875)
NetC1_2: C1.2 FB1.2 R1.2 | length 3
  Top Layer w0.2: C1.2 -5.386,10.339 R1.2@-5.375,10.35 ; FB1.2 -5.4,9.275 R1.2
NetD6_2: D6.2 R6.1 | length 3.4
  Top Layer w0.25: R6.1@-0.46,4.459 -0.46,4.434 -0.335,4.309 -0.31,4.309 -0.013,4.012 -0.013,2.263 0.6,1.65 D6.2
NetD6_3: D6.3 R5.1 | length 1.5
  Top Layer w0.25: R5.1 -1.977,2.275 -1.852,2.15 -1.827,2.15 -1.647,1.97 -1.239,1.97 -1.094,1.825 -0.925,1.825 D6.3
NetD6_4: D6.4 R4.1 | length 1.4
  Top Layer w0.25: R4.1 -1.907,3.479 -1.515,3.086 -1.221,3.086 -1.075,2.94 -1.075,2.925 -0.95,2.8 D6.4@-0.8,2.8
nRESET: J6.5 U2.4 | length 9.6
  Top Layer w0.25: U2.4 0.7,15.027 1.352,14.375 4.152,14.375 4.868,13.66 4.868,11.512 J6.5
SWCLK: J6.4 U2.20 | length 2.7
  Top Layer w0.2: J6.4@4.202,11.909 J6.4@4.249,11.955
  Top Layer w0.25: U2.20 2.65,11.773 2.832,11.955 J6.4@4.249,11.955
SWDIO: J6.2 U2.19 | length 4.1
  Top Layer w0.2: J6.2@4.074,13.051 J6.2@4.249,13.225
  Top Layer w0.25: U2.19 2,11.98 3.245,13.225 J6.2@4.249,13.225
pads on no net: J1. J2. U1.4 U2.2 U2.3 U2.6 U2.7 U2.9 U2.11

## Silkscreen, mask and mechanical layers (free items; w line width, h text height)
Top Overlay:
  drawing of 2733 lines, arcs and shapes, not listed
Bottom Overlay:
  drawing of 2735 lines, arcs and shapes, not listed
  text "Accelerometer" at 4.596,8.735 h1.1
  text "'.ProjectCodenameID'-'.ProjectRevision'" at 3.3,7.108 h1.1
Dimension:
  drawing of 230 lines, arcs and shapes, not listed
Board Outline:
  drawing of 230 lines, arcs and shapes, not listed
Top Assy:
  drawing of 230 lines, arcs and shapes, not listed
Bottom Assy:
  drawing of 230 lines, arcs and shapes, not listed

## Text inside footprints (layer, text, board x,y; h text height)
J1: Mechanical 9 "Jacdac / cable connector  / body" at 4.821,29.008 h1.7; Alignment "board outline  / for 'outie'" at -5.14,19.864 h1.2; Alignment "board outline  / for 'innie'" at -4.53,17.019 h1.2
J2: Mechanical 9 "Jacdac / cable connector  / body" at 4.821,-10.008 h1.7 r180; Alignment "board outline  / for 'innie'" at -4.53,1.981 h1.2 r180; Alignment "board outline  / for 'outie'" at -5.14,-0.864 h1.2 r180
MH2: Assembly Notes "board outline can  / be on 2.0mm   / radius if necessary" at 10.294,-1.556 h0.5; Assembly Notes "5mm dia keepout  / for traces and  / components to  / allow space for  / bushes/standoffs/ / nuts/screw heads" at 10.294,2.889 h0.5